# EAGLE board TinkerAccess (EAGLE 9.6.2)
REV: A
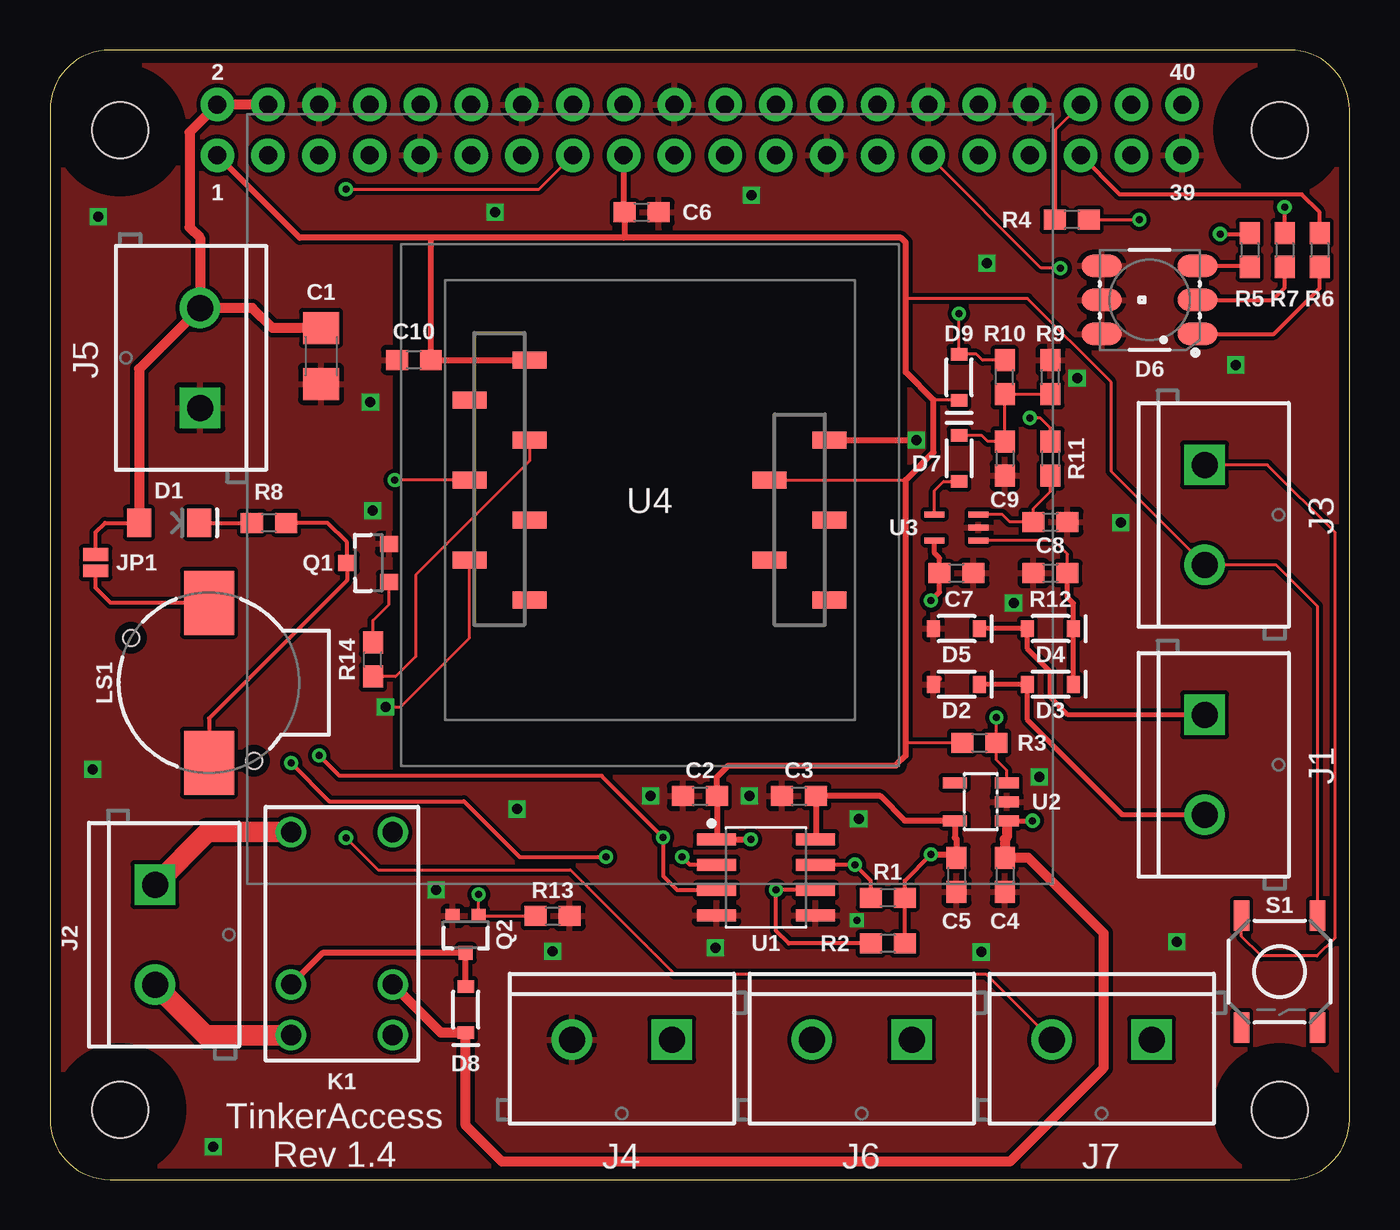
[diagram p0: board, top side]
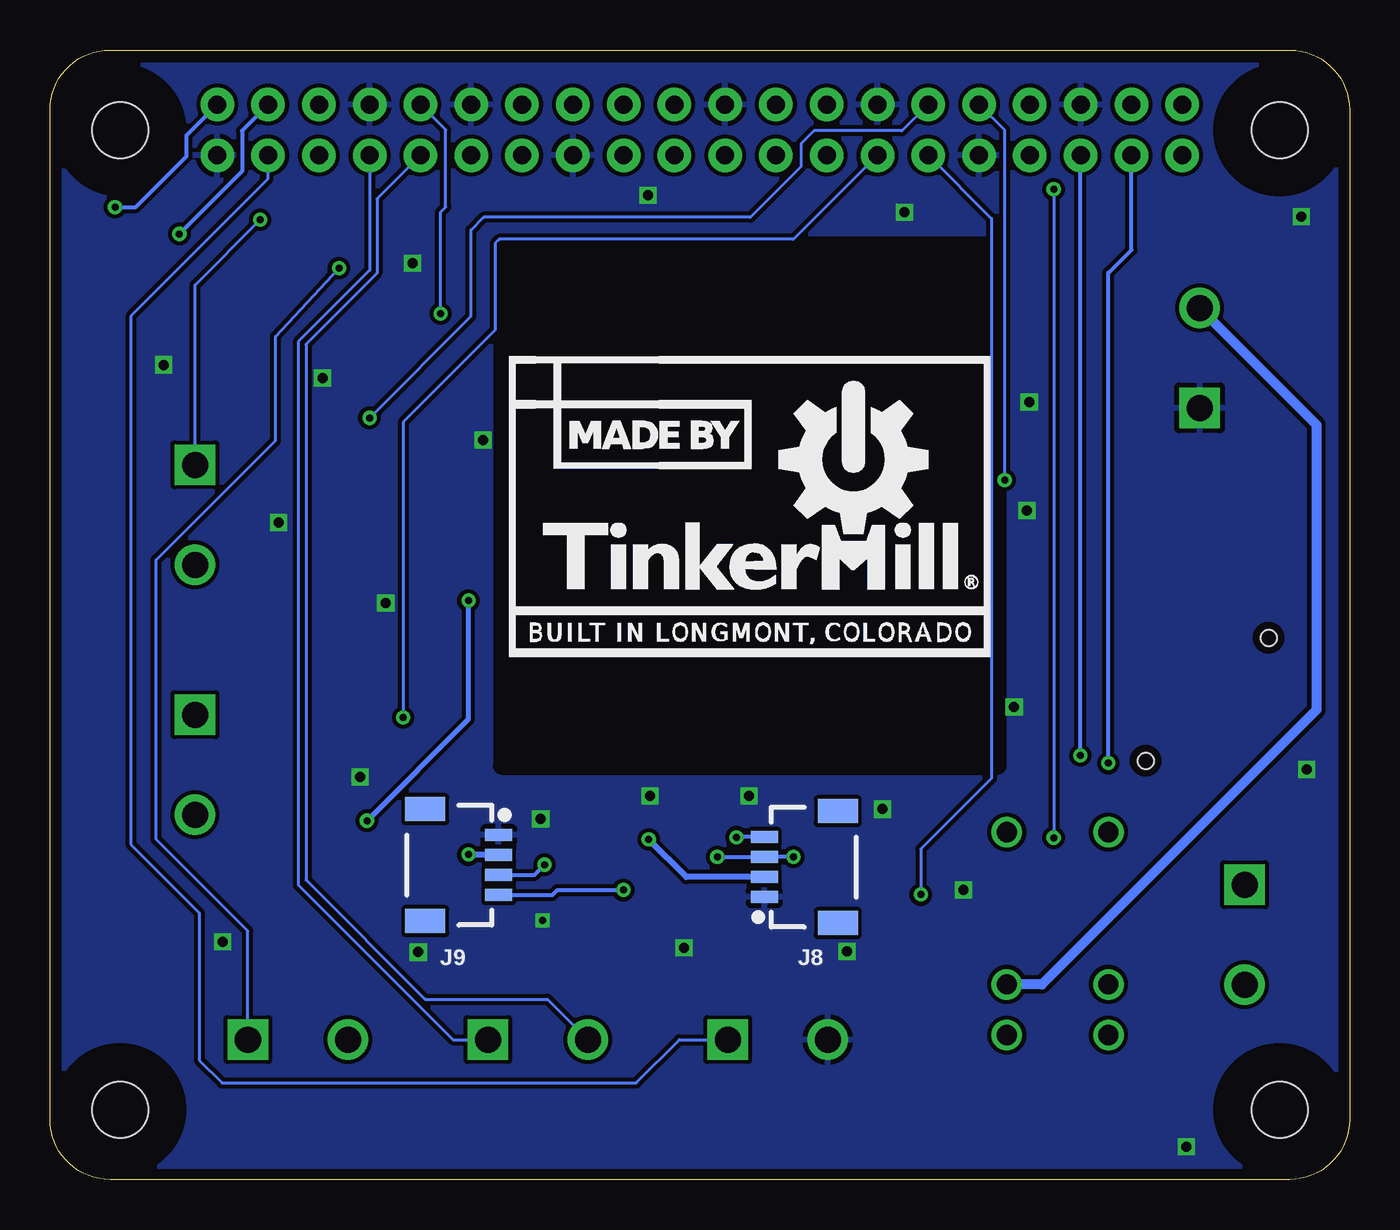
[diagram p1: board, bottom side, seen from below]

Size 65 x 56.5 mm. Coordinates in mm from the lower left corner, seen from the top.
Copper layers (1*16): Top 0.0356mm / dielectric 1.5011mm / Bottom 0.0356mm
Design rules "LaenPCBOrder *": minimum track width 6mil, minimum drill 0.3mm, track to track 6mil, track to pad 6mil, pad to pad 6mil, via to via 6mil, smd to smd 6mil, copper to edge 15mil, drill to drill 6mil, minimum pad ring 7mil, minimum via ring 7mil, stop-mask expansion 3mil, vias tented up to drill 0mil, thermal gap 10mil
tRestrict: area 17.6,20.7 to 42.4,46.7
bRestrict: area 17.6,20.7 to 42.4,46.7; area 0.4,0.4 to 6.6,6.6; area 0.4,49.4 to 6.6,55.6; area 58.4,49.4 to 64.6,55.6; area 58.4,0.4 to 64.6,6.6

## Footprints (pad centres in the part's own frame; a part is rotated, then mirrored left to right if it is on the bottom)
1206 = smd 1.6 x 1.8: 1 -1.4,0; 2 1.4,0
0603 = smd 1.1 x 1: 1 -0.85,0; 2 0.85,0
LED-1206 = smd 1.2 x 1.4: A -1.5,0; C 1.5,0
SOD-323 = smd 0.63 x 0.83: A 1.15,0; C -1.15,0
LED-TRICOLOR-5050 = smd 2 x 1.1: 1 -2.4,1.7; 2 -2.4,0; 3 -2.4,-1.7; 4 2.4,-1.7; 5 2.4,0; 6 2.4,1.7
SCREWTERMINAL-5MM-2 = drill 1.3 pad 2.032 square: 1 0,0 | drill 1.3 pad 2.032: 2 5,0
1X04_1MM_RA = smd 0.6 x 1.35: 1 -1.5,0; 2 -0.5,0; 3 0.5,0; 4 1.5,0 | smd 1.2 x 2: NC1 2.8,-3.675; NC2 -2.8,-3.675
SMT-JUMPER_2_NC_PASTE_NO-SILK = smd 0.635 x 1.27: 1 -0.406,0; 2 0.406,0
RELAY-G5V = drill 1.016: 1 5.08,2.54; 2 2.54,2.54; 5 -5.08,2.54; 6 -5.08,-2.54; 9 2.54,-2.54; 10 5.08,-2.54
BUZZER-CCV = smd 3.2 x 2.5: + 4,0; - -4,0 | hole 0.8: -3.9,-2.25; 2.25,3.9
SOT23-3 = smd 0.8 x 0.9: 1 -0.95,-1; 2 0.95,-1; 3 0,1.1
SOT323 = smd 0.7 x 0.7: 1 -0.65,-0.925; 2 0.65,-0.925; 3 0,0.925
PI_HAT_NOSLOTS = drill 0.9 pad 1.676: 1 8.37,51.23; 2 8.37,53.77; 3 10.91,51.23; 4 10.91,53.77; 5 13.45,51.23; 6 13.45,53.77; 7 15.99,51.23; 8 15.99,53.77; 9 18.53,51.23; 10 18.53,53.77; 11 21.07,51.23; 12 21.07,53.77; 13 23.61,51.23; 14 23.61,53.77; 15 26.15,51.23; 16 26.15,53.77; 17 28.69,51.23; 18 28.69,53.77; 19 31.23,51.23; 20 31.23,53.77; 21 33.77,51.23; 22 33.77,53.77; 23 36.31,51.23; 24 36.31,53.77; 25 38.85,51.23; 26 38.85,53.77; 27 41.39,51.23; 28 41.39,53.77; 29 43.93,51.23; 30 43.93,53.77; 31 46.47,51.23; 32 46.47,53.77; 33 49.01,51.23; 34 49.01,53.77; 35 51.55,51.23; 36 51.55,53.77; 37 54.09,51.23; 38 54.09,53.77; 39 56.63,51.23; 40 56.63,53.77 | hole 2.8: 3.5,3.5; 3.5,52.5; 61.5,52.5; 61.5,3.5
TACTILE_SWITCH_SMD_5.2MM = smd 1.524 x 0.762: 1 -2.794,1.905; 2 2.794,1.905; 3 -2.794,-1.905; 4 2.794,-1.905
SOIC127P600X175-8 = smd 1.968 x 0.602: 1 -2.473,1.905; 2 -2.473,0.635; 3 -2.473,-0.635; 4 -2.473,-1.905; 5 2.473,-1.905; 6 2.473,-0.635; 7 2.473,0.635; 8 2.473,1.905
SOT23-5 = smd 0.55 x 1.2: 1 -0.95,-1.3; 2 0,-1.3; 3 0.95,-1.3; 4 0.95,1.3; 5 -0.95,1.3
SC-70-5 = smd 0.3 x 1: 1 -0.65,-1.1; 2 0,-1.1; 3 0.65,-1.1; 4 0.65,1.1; 5 -0.65,1.1
ID-12_SMD = smd 0.85 x 1.7: 1 2.993,-8.998; 2 0.993,-5.998; 3 -1.007,-8.998; 4 -3.007,-5.998; 5 -5.007,-8.998; 6 -5.007,6.013; 7 -3.007,9.013; 8 -1.007,6.013; 9 0.993,9.013; 10 2.993,6.013; 11 6.993,6.013; NC 4.993,9.013

## Placement (x,y rotation side)
C1  10uF  [1206]  13.56,41.19 270 top
C2  0.1uF  [0603]  32.51,19.18 0 top
C3  0.1uF  [0603]  37.47,19.18 0 top
C4  1uF  [0603]  47.75,15.24 270 top
C5  1uF  [0603]  45.34,15.24 270 top
C6  1uF  [0603]  29.59,48.39 0 top
C7  0.1uF  [0603]  45.34,30.33 0 top
C8  1uF  [0603]  50.04,32.89 0 top
C9  1uF  [0603]  47.75,36.07 270 top
C10  0.1uF  [0603]  18.2,41 0 top
D1  GREEN  [LED-1206]  5.95,32.85 0 top
D2  1A/100V  [SOD-323]  45.34,24.77 180 top
D3  1A/100V  [SOD-323]  50.04,24.77 180 top
D4  1A/100V  [SOD-323]  50.04,27.56 180 top
D5  1A/100V  [SOD-323]  45.34,27.56 180 top
D6  [LED-TRICOLOR-5050]  55,44 180 top
D7  1A/100V  [SOD-323]  45.47,36.07 270 top
D8  1A/100V  [SOD-323]  20.79,8.5 90 top
D9  1A/100V  [SOD-323]  45.47,40.13 90 top
J1  [SCREWTERMINAL-5MM-2]  57.75,23.25 270 top
J2  [SCREWTERMINAL-5MM-2]  5.25,14.75 270 top
J3  [SCREWTERMINAL-5MM-2]  57.75,35.75 270 top
J4  [SCREWTERMINAL-5MM-2]  31.1,7 180 top
J5  [SCREWTERMINAL-5MM-2]  7.5,38.6 90 top
J6  [SCREWTERMINAL-5MM-2]  43.1,7 180 top
J7  [SCREWTERMINAL-5MM-2]  55.1,7 180 top
J8  [1X04_1MM_RA]  29.27,15.63 90 bottom
J9  [1X04_1MM_RA]  42.56,15.73 270 bottom
JP1  BUZZ  [SMT-JUMPER_2_NC_PASTE_NO-SILK]  2.29,30.86 90 top
K1  RELAY-SPDT-2-G5V  [RELAY-G5V]  14.6,12.3 270 top
LOGO1  MADE_BY_TINKERMILL  [MADE_BY_TINKERMILL]  42.04,26.16 0 bottom
LS1  BUZZER  [BUZZER-CCV]  7.95,24.85 90 top
Q1  500mA/300V  [SOT23-3]  15.95,30.85 90 top
Q2  310mA/60V/1.6Ω  [SOT323]  20.79,12.25 180 top
R1  10k  [0603]  41.91,14.1 180 top
R2  10k  [0603]  41.91,11.81 180 top
R3  10k  [0603]  46.48,21.84 0 top
R4  10k  [0603]  51.11,48.01 180 top
R5  300  [0603]  60,46.5 270 top
R6  150  [0603]  63.5,46.5 270 top
R7  330  [0603]  61.75,46.5 270 top
R8  330  [0603]  10.95,32.85 180 top
R9  100k  [0603]  50.04,40.13 90 top
R10  1k  [0603]  47.75,40.13 90 top
R11  10k  [0603]  50.04,36.07 270 top
R12  1k  [0603]  50.04,30.33 0 top
R13  10k  [0603]  25.15,13.18 0 top
R14  180  [0603]  16.15,26.01 90 top
RPI1  RASPBERRYPI_BPLUS_HATNOSLOTS  [PI_HAT_NOSLOTS]  0,0 0 top
S1  LogOut  [TACTILE_SWITCH_SMD_5.2MM]  61.5,10.4 270 top
U1  Si8600AC  [SOIC127P600X175-8]  35.81,15.11 0 top
U2  AP2112  [SOT23-5]  46.56,18.9 90 top
U3  ADCMP-371  [SC-70-5]  45.34,32.61 90 top
U4  ID-12/20SMD  [ID-12_SMD]  30,34 90 top

## Library data of the parts
C1 = SparkFun-Capacitors; PROD_ID: CAP-10057
C2 C3 C10 = SparkFun-Capacitors; PROD_ID: CAP-00810
C4-C9 = SparkFun-Capacitors; PROD_ID: CAP-11015
D1 = SparkFun-LED; PROD_ID: DIO-00862
D2-D5 D7 D9 = SparkFun-DiscreteSemi; PROD_ID: DIO-09646
D6 = SparkFun-LED; PROD_ID: DIO-10298
D8 = SparkFun-DiscreteSemi; PROD_ID: DIO-11623
J1-J7 = SparkFun-Connectors; SF_SKU: PRT-08432
J8 J9 = SparkFun-Connectors
JP1 = SparkFun-Jumpers
K1 = SparkFun-Retired; SF_SKU: COM-00524
LOGO1 U3 = TinkerMill
LS1 = SparkFun-Electromechanical; PROD_ID: COMP-08568
Q1 = SparkFun-DiscreteSemi; PROD_ID: TRANS-09116
Q2 = SparkFun-DiscreteSemi; PROD_ID: TRANS-11151
R1-R4 = SparkFun-Resistors; PROD_ID: RES-00824
R5 = SparkFun-Resistors; PROD_ID: RES_10328
R6 = SparkFun-Resistors; PROD_ID: RES-11028
R7 = SparkFun-Resistors; PROD_ID: RES-00818
R8 R14 = SparkFun-Resistors; PROD_ID: RES-08283
R9-R13 = SparkFun-Resistors; PROD_ID: RES-07856
RPI1 = microbuilder
S1 = SparkFun-Switches; PROD_ID: SWCH-08247; SF_SKU: COM-08720
U1 = TinkerMill; PARTNUMBER: Si8600
U2 = v-reg-micrel; OC_FARNELL: unknown; OC_NEWARK: unknown
U4 = SparkFun-RF; PROD_ID: CONN-09345, CONN-09344

## Nets
3.3V: C2.2 C6.1 C10.2 D9.C J3.2 J8.2 R3.1 RPI1.1 RPI1.17 S1.1 U1.1 U4.2 U4.11
3.3V_EN: R3.2 RPI1.13 U2.3
5V: C1.1 C4.1 C7.1 D1.A D8.C J5.2 JP1.2 K1.2 RPI1.2 RPI1.4 U2.1 U3.5
+3V3: C3.2 C5.1 J9.2 R1.1 R2.1 U1.8 U2.5
AC1: D4.A D5.C J1.1
AC2: D2.C D3.A J1.2
BSCL: J9.4 R2.2 U1.6
BSDA: J9.3 R1.2 U1.7
COMPOUT: D7.A U3.4
DETECT: C9.1 D7.C R9.1 R10.1
EECLK: RPI1.28
EEDATA: RPI1.27
GND: C1.2 C2.1 C3.1 C4.2 C5.2 C6.2 C7.2 C8.2 C9.2 C10.1 D2.A D5.A D6.4 D6.5 D6.6 J4.2 J5.1 J8.1 J9.1 Q1.2 Q2.2 R9.2 R12.1 R13.2 RPI1.6 RPI1.9 RPI1.14 RPI1.20 RPI1.25 RPI1.30 RPI1.34 RPI1.39 U1.4 U1.5 U2.2 U3.2 U4.1 U4.7
GPIO4: RPI1.7
GPIO5: J7.1 RPI1.29
GPIO6: J6.2 RPI1.31
GPIO12: D9.A R10.2 RPI1.32
GPIO13: J6.1 RPI1.33
GPIO16: R4.2 RPI1.36
GPIO18: R11.1 RPI1.12
GPIO22: J7.2 RPI1.15
GPIO23: RPI1.16
GPIO24: RPI1.18
GPIO25: RPI1.22
GPIO26: J4.1 RPI1.37
LED_BLUE: R5.1 RPI1.38
LED_GREEN: R6.1 RPI1.35
LED_RED: R7.1 RPI1.40
LED_RFID: R14.1 U4.10
LOGOUT: J3.1 R4.1 S1.3
N$1: Q1.1 R14.2
N$2: JP1.1 LS1.+
N$3: LS1.- Q1.3 R8.1
N$4: D1.C R8.2
N$5: D8.A K1.9 Q2.3
N$6: J2.1 K1.6
N$7: J2.2 K1.10
N$9: D6.2 R7.2
N$10: D6.1 R6.2
N$11: D6.3 R5.2
RECT+: D3.C D4.C R12.2 U3.1
RELAY: Q2.1 R13.1 RPI1.11
RXD: RPI1.10 U4.9
SCL: J8.4 RPI1.5 U1.3
SDA: J8.3 RPI1.3 U1.2
SPI_CE0: RPI1.24
SPI_CE1: RPI1.26
SPI_MISO: RPI1.21
SPI_MOSI: RPI1.19
SPI_SCLK: RPI1.23
TXD: RPI1.8
VREF: C8.1 R11.2 U3.3

## Tracks (layer width: path | path; a pad name or v marks a point on that pad's centre or on a via)
3.3V  (via drill 0.35)
  Top 0.152: S1.1 63.41,28.67 61.33,30.75 J3.2 53.09,35.41 53.09,39.88 48.9,44.07 42.8,44.07 | U4.2 42.8,34.99 | D9.C 44.2,38.98 | R3.1 42.8,21.84
  Top 0.305: v35.05,17.02 U1.1 33.36,17.04 C2.2 33.36,20.13 33.93,20.7 42.29,20.7 42.8,21.21 42.8,21.84 42.8,34.99 44.2,36.39 44.2,38.98 44.2,38.99 42.8,40.38 42.8,44.07 42.8,46.87 42.57,47.1 28.7,47.1 | U4.11 C10.2 19.05,47.1 | RPI1.17 28.69,48.44 C6.1 28.74,47.14 28.7,47.1 | 28.7,47.1 19.05,47.1 | 19.05,47.1 12.5,47.1 RPI1.1
  Bottom 0.305: J8.2 33.17,15.13 v35.05,17.02
3.3V_EN  (via drill 0.35)
  Top 0.152: U2.3 47.86,20.47 47.33,20.99 R3.2 v47.33,23.11
  Bottom 0.152: v47.33,23.11 47.33,37.88 42.73,42.49 42.73,46.84 42.53,47.03 27.81,47.03 RPI1.13
5V  (via drill 0.35)
  Top 0.203: JP1.2 2.29,32.38 2.75,32.85 D1.A
  Top 0.254: JP1.2 1.96,31.27 1.95,31.26 | U3.5 44.24,31.33 44.49,31.08 C7.1 44.49,29.38 v44.07,28.96 | U2.1 v49.15,17.95
  Top 0.508: 4.25,33.05 D1.A 4.45,40.55 J5.2 | RPI1.4 RPI1.2 6.99,52.38 6.99,47.62 7.5,47.11 J5.2 | C1.1 11.13,42.59 10.12,43.6 J5.2 | U2.1 47.86,17.12 47.75,17.02 C4.1 48.93,16.09 52.7,12.32 52.7,5.59 48.01,0.89 22.61,0.89 20.79,2.7 D8.C 19.55,7.35 K1.2
  Bottom 0.254: v49.15,17.95 44.07,23.03 v44.07,28.96
  Bottom 0.508: J5.2 1.65,37.75 1.65,23.5 15.39,9.76 K1.2
+3V3  (via drill 0.35)
  Top 0.203: R2.1 R1.1 42.76,14.95 v44.07,16.26
  Top 0.254: 45.22,17.91 U2.5
  Top 0.305: v44.07,16.26 45.17,16.26 C5.1 45.34,17.02 45.26,17.1 U2.5 42.76,17.95 41.53,19.18 C3.2 38.31,17.05 U1.8
  Bottom 0.305: J9.2 44.05,16.23 v44.07,16.26
AC1
  Top 0.254: D5.C D4.A 48.89,26.55 50.04,25.4 50.04,24.13 50.92,23.25 J1.1
AC2
  Top 0.254: J1.2 53.63,18.25 48.89,22.99 D3.A D2.C
BSCL  (via drill 0.35)
  Top 0.203: U1.6 v36.32,14.48 36.32,12.45 36.96,11.81 R2.2
  Bottom 0.203: J9.4 39.87,14.23 39.62,14.48 v36.32,14.48
  Bottom 0.254: 42.55,14.22 J9.4
BSDA  (via drill 0.35)
  Top 0.203: 41.02,14.14 R1.2 41.06,14.95 v40.26,15.75 U1.7
  Bottom 0.203: J9.3 40.77,15.23 v40.26,15.75
COMPOUT
  Top 0.152: U3.4 44.24,34.46 44.7,34.92 D7.A
DETECT
  Top 0.152: D7.C 46.6,37.22 46.9,36.92 C9.1 R10.1 R9.1
GND  (via drill 0.35 pad 0.55, 0.5 pad 0.55)
  Top 0.152: v16.78,23.63 17.53,23.63 20.99,27.08 U4.7
  Top 0.3: 44.47,25.04 D2.A
  Top 0.305: U4.1 v43.33,36.99
  other vias: 16.02,38.89 2.14,20.52 19.31,14.49 25.13,11.41 23.35,18.53 51.38,40.09 16.14,33.45 22.27,48.39 48.2,28.84 53.57,32.85 35.09,49.24 40.36,12.95 8.16,1.63 2.41,48.17 30.04,19.19 56.35,11.88 46.87,45.83 33.3,11.58 46.58,11.38 49.5,20.14 59.32,40.75 34.99,19.19 40.45,18.05
  pour Top (isolate 0.203): 64.3,55.7 64.3,0.7 0.7,0.7 0.7,55.7
  pour Bottom (isolate 0.203): 64.3,55.7 64.3,0.7 0.7,0.7 0.7,55.7
GPIO5  (via drill 0.35)
  Top 0.152: v50.55,45.59 49.57,45.59 RPI1.29
  Bottom 0.152: J7.1 55.1,12.43 59.69,17.02 59.69,30.99 53.72,36.96 53.72,42.16 v50.55,45.59
GPIO6
  Bottom 0.152: RPI1.31 48.64,49.06 48.64,45.34 52.2,41.78 52.2,14.99 46.23,9.02 40.12,9.02 J6.2
GPIO12  (via drill 0.35)
  Top 0.152: R10.2 46.65,40.98 46.35,41.28 D9.A v45.47,43.31
  Bottom 0.152: RPI1.32 45.21,52.51 45.21,48.64 45.47,48.39 v45.47,43.31
GPIO13
  Bottom 0.152: RPI1.33 49.01,45.48 52.58,41.91 52.58,14.73 44.85,7 J6.1
GPIO16
  Top 0.152: R4.2 50.29,48.04 50.29,52.51 RPI1.36
GPIO18  (via drill 0.35)
  Top 0.152: R11.1 50.04,37.59 49.53,38.1 v49.02,38.1
  Bottom 0.152: v49.02,38.1 43.94,43.18 43.94,47.5 43.31,48.13 29.97,48.13 27.43,50.67 27.43,51.82 26.8,52.45 22.39,52.45 RPI1.12
GPIO22  (via drill 0.35)
  Top 0.152: v14.8,17.1 16.41,15.49 26.04,15.49 31.24,10.29 46.81,10.29 J7.2 | v14.8,49.53 24.45,49.53 RPI1.15
  Bottom 0.152: v14.8,49.53 v14.8,17.1
GPIO26
  Bottom 0.152: RPI1.37 54.1,51.22 54.1,50.04 60.96,43.18 60.96,16.76 57.53,13.34 57.53,5.97 56.39,4.83 35.69,4.83 33.51,7 J4.1
LED_BLUE  (via drill 0.35)
  Top 0.203: R5.1 59.95,47.3 v58.53,47.3
  Bottom 0.203: v58.53,47.3 55.4,50.43 55.4,52.46 RPI1.38
LED_GREEN
  Top 0.203: R6.1 63.5,48.39 62.61,49.27 53.51,49.27 RPI1.35
LED_RED  (via drill 0.35)
  Top 0.203: R7.1 v61.75,48.64
  Bottom 0.203: v61.75,48.64 60.71,48.64 58.17,51.18 58.17,52.23 RPI1.40
LED_RFID
  Top 0.152: R14.1 17.28,25.16 18.29,26.16 18.29,30.24 23.99,35.94 U4.10
LOGOUT  (via drill 0.35)
  Top 0.152: R4.1 v54.49,48.01 | J3.1 60.9,35.75 64.26,32.38 64.26,12.06 63.37,11.18 60.58,11.18 59.59,12.16 S1.3
  Bottom 0.152: J3.1 57.75,44.75 v54.49,48.01
N$1
  Top 0.152: R14.2 16.15,27.96 16.95,28.76 Q1.1
N$2
  Top 0.203: LS1.+ 3.03,28.85 2.29,29.59 JP1.1
  Top 0.254: JP1.1 2.27,30.44 1.95,30.44
N$3
  Top 0.203: R8.1 13.89,32.85 14.85,31.89 Q1.3 14.85,29.96 7.95,23.06 LS1.-
  Top 0.5: 14.85,30.75 Q1.3
N$4
  Top 0.203: D1.C R8.2
N$5
  Top 0.305: D8.A Q2.3 13.63,11.33 K1.9
N$6
  Top 1.016: K1.6 7.88,17.38 J2.1
N$7
  Top 1.016: K1.10 7.78,7.22 J2.2
N$9
  Top 0.203: D6.2 61.15,44 61.75,44.6 R7.2
N$10
  Top 0.203: D6.1 61.22,42.3 63.5,44.58 R6.2
N$11
  Top 0.203: D6.3 59.95,45.7 R5.2
RECT+
  Top 0.152: R12.2 50.89,31.28 50.21,31.96 U3.1
  Top 0.254: D3.C D4.C 51.19,28.82 50.89,29.12 R12.2
RELAY  (via drill 0.35)
  Top 0.152: v21.44,14.25 Q2.1 R13.1
  Bottom 0.152: v21.44,14.25 21.44,16.53 17.91,20.07 17.91,48.07 RPI1.11
RXD  (via drill 0.35)
  Top 0.152: U4.9 v17.25,34.99
  Bottom 0.152: v17.25,34.99 17.25,52.49 RPI1.10
SCL  (via drill 0.35)
  Top 0.203: U1.3 31.37,14.48 30.67,15.18 v30.67,17.12 27.59,20.19 14.48,20.19 v13.46,21.21
  Bottom 0.203: J8.4 30.65,17.13 v30.67,17.12 | v13.46,21.21 13.46,51.22 RPI1.5
  Bottom 0.254: v13.45,21.22 v13.46,21.21
SDA  (via drill 0.35)
  Top 0.203: U1.2 32.01,15.75 v31.62,16.13 | v12.06,20.83 13.97,18.92 20.7,18.92 23.49,16.13 v27.81,16.13
  Bottom 0.203: v31.62,16.13 J8.3 v27.81,16.13 | v12.06,20.83 12.06,45.34 10.91,46.49 RPI1.3
VREF
  Top 0.152: U3.3 47.64,33.26 48.01,32.89 C8.1 49.19,33.57 50.04,34.42 R11.2

## Text on the board
tPlace: 2 | 40 | 1 | 39 | TinkerAccess / Rev 1.4
tSilk: Sensitivity